# EAGLE board nrf5340_Ref_v21 (EAGLE 9.7.0)
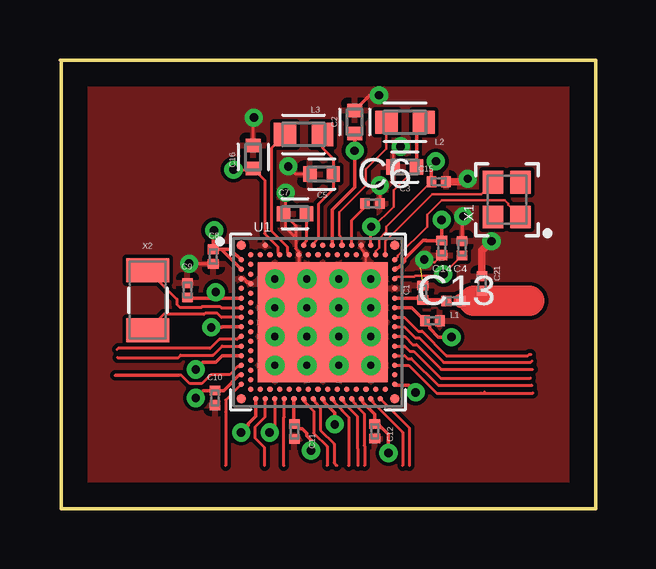
[diagram p0: board, top side]
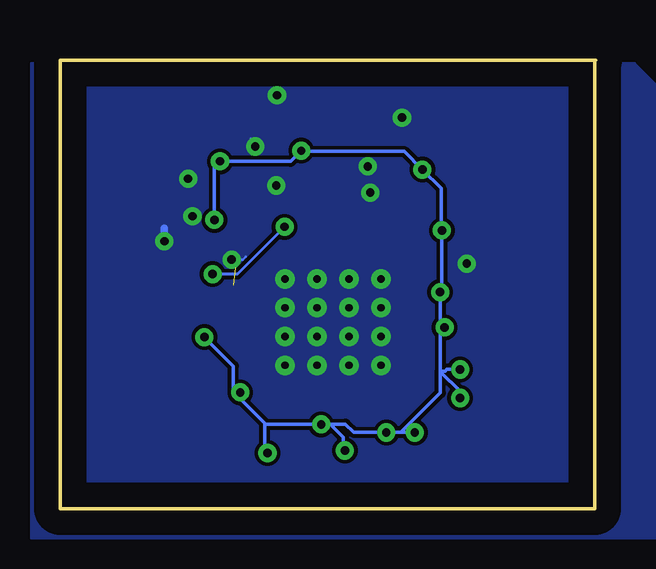
[diagram p1: board, bottom side, seen from below]

Size 22.33 x 18.7 mm. Coordinates in mm from the lower left corner, seen from the top.
Outline: 0,18.7 22.33,18.7 22.33,0 0.05,0 0.05,18.65 0,18.7
Copper layers (1+2*15+16): Top 0.035mm / dielectric 1.5mm / Route2 0.035mm / dielectric 0.15mm / Route15 0.035mm / dielectric 0.2mm / Bottom 0.035mm
Design rules "default *": minimum track width 0.005mm, minimum drill 0.35mm, track to track 6mil, track to pad 6mil, pad to pad 6mil, via to via 6mil, smd to smd 6mil, copper to edge 40mil, drill to drill 6mil, minimum pad ring 10mil, minimum via ring 8mil, stop-mask expansion 4mil, vias tented up to drill 0mil, thermal gap 10mil

## Footprints (pad centres in the part's own frame; a part is rotated, then mirrored left to right if it is on the bottom)
RESC0201_N = smd 0.4 x 0.45: 1 -0.305,0; 2 0.305,0
CAPC1005X60 = smd 0.56 x 0.629: 1 -0.485,0; 2 0.485,0
INDC1608X95N = smd 0.9 x 0.97: 1 -0.785,0 | smd 0.933 x 0.97: 2 0.769,0
XCVR_NRF5340-QKAA-R7 = drill 0.305 pad 0.61: 35 -1.8,-1.8; 36 -0.467,-1.8; 37 0.867,-1.8; 38 2.2,-1.8; 39 -1.8,-0.6; 40 -0.467,-0.6; 41 0.867,-0.6; 43 2.2,-0.6; 44 -1.8,0.6; 45 -0.467,0.6; 46 0.867,0.6; 47 2.2,0.6; 48 -1.8,1.8; 49 -0.467,1.8; 50 0.867,1.8; 51 2.2,1.8 | smd 5.4 x 5: 104 0.2,0 | smd 0.4 x 0.4: A1 -3.2,3.2; A31 3.2,3.2; AL1 -3.2,-3.2; AL31 3.2,-3.2 | smd 0.225 x 0.225: A5 -2.2,3.2; A13 -0.6,3.2; A15 -0.2,3.2; A17 0.2,3.2; A19 0.6,3.2; A21 1,3.2; A23 1.4,3.2; A25 1.8,3.2; A27 2.2,3.2; AA1 -3.2,-1; AA31 3.2,-1; AB2 -2.8,-1.2; AC1 -3.2,-1.4; AC31 3.2,-1.4; AD2 -2.8,-1.6; AE1 -3.2,-1.8; AE31 3.2,-1.8; AF2 -2.8,-2; AG1 -3.2,-2.2; AG31 3.2,-2.2; AH2 -2.8,-2.4; AJ1 -3.2,-2.6; AJ31 3.2,-2.6; AK2 -2.8,-2.8; AK4 -2.4,-2.8; AK6 -2,-2.8; AK8 -1.6,-2.8; AK10 -1.2,-2.8; AK12 -0.8,-2.8; AK14 -0.4,-2.8; AK16 0,-2.8; AK18 0.4,-2.8; AK20 0.8,-2.8; AK22 1.2,-2.8; AK24 1.6,-2.8; AK26 2,-2.8; AK28 2.4,-2.8; AK30 2.8,-2.8; AL3 -2.6,-3.2; AL5 -2.2,-3.2; AL7 -1.8,-3.2; AL9 -1.4,-3.2; AL11 -1,-3.2; AL13 -0.6,-3.2; AL15 -0.2,-3.2; AL17 0.2,-3.2; AL19 0.6,-3.2; AL21 1,-3.2; AL23 1.4,-3.2; AL25 1.8,-3.2; AL27 2.2,-3.2; AL29 2.6,-3.2; B2 -2.8,2.8; B4 -2.4,2.8; B6 -2,2.8; B8 -1.6,2.8; B10 -1.2,2.8; B12 -0.8,2.8; B14 -0.4,2.8; B16 0,2.8; B18 0.4,2.8; B20 0.8,2.8; B22 1.2,2.8; B24 1.6,2.8; B26 2,2.8; B28 2.4,2.8; B30 2.8,2.8; C1 -3.2,2.6; C31 3.2,2.6; D2 -2.8,2.4; E1 -3.2,2.2; E31 3.2,2.2; F2 -2.8,2; G1 -3.2,1.8; G31 3.2,1.8; H2 -2.8,1.6; J1 -3.2,1.4; J31 3.2,1.4; K2 -2.8,1.2; L1 -3.2,1; L31 3.2,1; M2 -2.8,0.8; N1 -3.2,0.6; N31 3.2,0.6; P2 -2.8,0.4; R1 -3.2,0.2; R31 3.2,0.2; T2 -2.8,0; U1 -3.2,-0.2; U31 3.2,-0.2; V2 -2.8,-0.4; W1 -3.2,-0.6; W31 3.2,-0.6; Y2 -2.8,-0.8
BT-XTAL_2016_N = smd 0.95 x 0.85: 1 -0.725,-0.575; 2 0.725,-0.575; 3 0.725,0.575; 4 -0.725,0.575
XTAL_3215_N = smd 1 x 1.8: 1 -1.25,0; 2 1.25,0

## Placement (x,y rotation side)
C1  0.7p  [RESC0201_N]  15.12,9 90 top
C2  1u  [CAPC1005X60]  12.28,16.12 90 top
C3  1u  [CAPC1005X60]  14.37,14.24 180 top
C4  2.2n  [RESC0201_N]  16.75,10.86 90 top
C5  1u  [CAPC1005X60]  10.9,13.95 180 top
C6  100n  [RESC0201_N]  13.02,12.72 0 top
C7  1u  [CAPC1005X60]  9.79,12.3 180 top
C8  100n  [RESC0201_N]  6.39,10.51 270 top
C9  100n  [RESC0201_N]  5.31,9.11 90 top
C10  100n  [RESC0201_N]  6.46,4.62 270 top
C11  100n  [RESC0201_N]  9.77,3.22 270 top
C12  100n  [RESC0201_N]  13.11,3.23 270 top
C13  100n  [RESC0201_N]  15.52,7.84 0 top
C14  100n  [RESC0201_N]  15.91,10.87 270 top
C15  100n  [RESC0201_N]  15.78,13.63 0 top
C16  1u  [CAPC1005X60]  8.05,14.66 90 top
C21  N.C.  [RESC0201_N]  17.58,9.39 90 top
L1  2.2n  [RESC0201_N]  16.4,8.66 180 top
L2  10u  [INDC1608X95N]  14.37,16.11 180 top
L3  10u  [INDC1608X95N]  10.15,15.6 180 top
U1  NRF5340-QKAA-R7  [XCVR_NRF5340-QKAA-R7]  10.75,7.78 0 top
X1  [BT-XTAL_2016_N]  18.62,12.88 90 top
X2  [XTAL_3215_N]  3.66,8.7 270 top

## Library data of the parts
C1 C4 C6 C8-C15 C21 L1 = ChronosV5 v10
C2 C3 C5 C7 C16 = ChronosV5 v10; CATEGORY: Capacitor
L2 L3 = Inductor; CATEGORY: Inductor; SUB-CATEGORY: Fixed
U1 = NRF5340-QKAA-R7; MANUFACTURER: Nordic Semiconductor; MAXIMUM_PACKAGE_HEIGHT: 0.85mm; PARTREV: 1.0; STANDARD: Manufacturer Recommendations
X1 X2 = Nordic_nRF

## Nets
DCCH: U1.J1
DECUSB: U1.B6
GND: C1.2 C2.2 C3.2 C4.2 C5.2 C6.2 C7.2 C8.2 C9.2 C10.2 C11.2 C12.2 C13.2 C14.2 C15.2 C16.2 C21.2 U1.35 U1.36 U1.37 U1.38 U1.39 U1.40 U1.41 U1.43 U1.44 U1.45 U1.46 U1.47 U1.48 U1.49 U1.50 U1.51 U1.104 U1.A5 U1.A25 U1.B12 U1.B26 U1.G1 U1.H2 U1.J31
N$1: C1.1 L1.2 U1.L31
N$2: U1.C31 X1.1
N$3: U1.B30 X1.3
N$4: C6.1 U1.A23
N$5: L2.2 U1.A21
N$6: L3.2 U1.B10
N$7: C5.1 L3.1 U1.A15
N$8: C3.1 C4.1 L2.1 U1.A27 U1.G31
N$9: C7.1 U1.A13
P0.00: U1.N1 X2.1
P0.01: U1.R1 X2.2
P0.02: U1.W1
P0.03: U1.AA1
P0.04: U1.V2
P0.05: U1.Y2
P0.06: U1.AB2
P0.07: U1.AD2
P0.08: U1.AH2
P0.09: U1.AJ1
P0.10: U1.AK2
P0.11: U1.AK4
P0.12: U1.AK6
P0.13: U1.AL5
P0.14: U1.AK8
P0.15: U1.AK10
P0.16: U1.AL9
P0.17: U1.AK12
P0.18: U1.AK14
P0.19: U1.AL13
P0.20: U1.AK16
P0.21: U1.AL15
P0.22: U1.AK18
P0.23: U1.AK20
P0.24: U1.AL27
P0.25: U1.AK28
P0.26: U1.AL29
P0.27: U1.AK30
P0.28: U1.AE31
P0.29: U1.U31
P0.30: U1.B24
P0.31: U1.B22
P1.00: U1.M2
P1.01: U1.P2
P1.02: U1.AE1
P1.03: U1.AF2
P1.04: U1.AL19
P1.05: U1.AK22
P1.06: U1.AL21
P1.07: U1.AK24
P1.08: U1.AL23
P1.09: U1.AK26
P1.10: U1.R31
P1.11: U1.B20
P1.12: U1.B18
P1.13: U1.A17
P1.14: U1.B16
P1.15: U1.B14
RESET: U1.AC31
RF: C21.1 L1.1
SWDCLK: U1.W31
SWDIO: U1.AA31
VDD: C2.1 C8.1 C9.1 C10.1 C11.1 C12.1 C13.1 C14.1 C15.1 C16.1 U1.A19 U1.AC1 U1.AG1 U1.AJ31 U1.AL3 U1.AL7 U1.AL11 U1.AL17 U1.AL25 U1.B8 U1.B28 U1.C1 U1.E1 U1.E31 U1.L1 U1.N31 U1.U1

## Tracks (layer width: path | path; a pad name or v marks a point on that pad's centre or on a via)
GND  (via drill 0.35, 0.35 pad 0.5)  (1 unrouted)
  Top 0.102: C14.2 15.61,10.27 15.12,10.27 15.12,10.26 | 15.12,10.26 15.02,10.16 15.02,10.05 | U1.A25 12.55,10.83 12.67,10.71 12.67,10.66 U1.B26 12.75,9.99 | U1.B12 9.95,10.35 9.95,9.91 U1.49 | v14.19,15.09 13.9,14.8 13.9,14.25 C3.2 | 12.75,9.99 12.75,9.78 U1.51 | U1.104 10.95,8.19 12.75,9.99 | 15.12,10.26 15.12,10.33 v15.18,10.38
  Top 0.127: C6.2 v13.33,13.46 v13.32,13.47 | 9.95,10.35 9.95,10.72 9.82,10.84 9.82,11.3 | C7.2 9.82,11.78 9.82,11.3 | C5.2 9.83,13.95 v9.51,14.27 | 9.82,11.3 9.4,11.72 v9.4,13.18 | C16.2 8.05,16.27 v8.08,16.3
  Top 0.15: C4.2 16.75,12.13 v16.81,12.19
  Top 0.152: U1.G1 7.67,9.58 7.81,9.44 7.89,9.44 U1.H2 | C8.2 5.4,10.2 v5.38,10.22 | C2.2 12.9,17.23 v13.29,17.23
  Top 0.305: C21.2 17.58,10.75 v17.98,11.15 | C15.2 16.87,13.63 v16.99,13.75
  Bottom 0.102: v14.19,15.09 14.19,15.22 14.39,15.42 | v15.18,10.38 14.71,10.38 14.59,10.5
  Bottom 0.305: 17.98,11.68 v17.98,11.15
  pour Bottom (no thermals): -21.41,-1.23 23.52,-1.23 23.52,18.57 -1.61,18.57
  pour Top: 21.48,19.28 -1,19.28 -1,-0.71 22.65,-0.71 23.24,-0.12 23.24,17.52
N$1
  Top 0.15: U1.L31 15.03,8.78 C1.1
  Top 0.203: C1.1 16.06,8.7 L1.2
N$2
  Top 0.102: U1.C31 14.08,10.51 14.08,10.54 15.3,11.76 15.3,12.26 15.9,12.86 18.53,12.86 18.67,12.71 18.67,12.68 X1.1
N$3
  Top 0.102: U1.B30 13.55,10.81 13.55,11.15 15.51,13.11 17.55,13.11 X1.3
N$4
  Top 0.127: C6.1 12.71,12.59 12.15,12.02 U1.A23
N$5
  Top 0.102: L2.2 13.6,15.01 12.74,14.14 12.74,13.46 11.63,12.35 11.63,11.4 11.75,11.28 U1.A21
N$6
  Top 0.127: U1.B10 9.48,10.65 9.48,10.91 8.81,11.58 8.81,15.03 L3.2
N$7
  Top 0.127: U1.A15 10.55,11.05 10.77,11.27 10.77,12.69 11.38,13.3 C5.1 11.38,14.59 10.94,15.05 L3.1
N$8  (via drill 0.35 pad 0.5)
  Top 0.102: U1.G31 14.03,9.66 14.77,9.66 14.81,9.71 15.9,9.71 v15.97,9.78 C4.1 | 14.87,14.23 13.9,13.27 13.9,12.58 13.02,11.7
  Top 0.127: U1.A27 12.95,11.63 13.02,11.7 v12.97,11.75
  Top 0.152: L2.1 14.87,15.82 14.87,14.23 C3.1
  Bottom 0.127: v12.97,11.75 14.94,9.78 v15.97,9.78
N$9
  Top 0.127: C7.1 10.28,11.7 10.28,11.18 10.15,11.05 U1.A13
P0.00
  Top 0.127: U1.N1 6.72,8.38 6.66,8.44 5.94,8.44 5.89,8.39 5,8.39 4.87,8.52 4.87,8.74 X2.1
P0.01
  Top 0.127: X2.2 4.32,8.11 6.01,8.11 6.06,8.16 6.55,8.16 6.72,7.98 U1.R1
P0.02
  Top 0.127: U1.W1 7.48,7.11 7.41,7.11 7.37,7.06 6.64,7.06 6.26,6.68 2.42,6.68 2.38,6.64
P0.03
  Top 0.127: 2.4,6.3 4.93,6.3 5.03,6.4 6.38,6.4 6.76,6.78 U1.AA1
P0.09
  Top 0.127: U1.AJ1 6.9,4.53 6.9,4.03 6.9,4.02 6.9,1.8
P0.13
  Top 0.127: U1.AL5 8.55,3.83 8.14,3.43 8.14,2.93 8.53,2.54 8.53,1.8
P0.16
  Top 0.127: U1.AL9 9.35,3.83 9.33,3.81 9.33,1.81 9.32,1.8
P0.19
  Top 0.127: 10.41,4.25 10.22,4.44 10.22,4.51 U1.AL13 10.15,4.49 10.57,4.07 10.57,3.16 11.13,2.6 11.13,1.8
P0.21
  Top 0.127: U1.AL15 10.62,4.51 10.62,4.44 10.72,4.35 10.72,4.32 10.85,4.18 10.85,3.27 11.42,2.71 11.42,1.92 11.54,1.8
P0.24
  Top 0.127: U1.AL27 13.02,4.51 13.02,4.44 14.28,3.18 14.28,1.8
P0.26
  Top 0.127: U1.AL29 14.56,3.37 14.56,1.8
P0.28
  Top 0.127: U1.AE31 14.53,5.98 15.69,4.82 17.55,4.82 17.65,4.82 | 17.65,4.82 17.69,4.86 17.69,4.87 | 17.65,4.82 19.69,4.82 19.7,4.83
P0.29
  Top 0.127: U1.U31 14.35,7.58 14.81,7.12 14.97,7.12 15.99,6.1 19.61,6.1 19.66,6.15
P1.02
  Top 0.127: 4.96,5.56 2.3,5.56 5.06,5.56 5.41,5.21 5.9,5.21 6.28,5.59 7.07,5.59 7.38,5.91 7.48,5.91 U1.AE1
P1.04
  Top 0.127: U1.AL19 11.42,4.51 11.42,4.44 11.76,4.11 11.76,4.09 12.04,3.8 12.04,1.81 12.03,1.8
P1.06
  Top 0.127: U1.AL21 11.82,4.51 11.82,4.44 12.04,4.23 12.04,4.2 12.39,3.85 12.39,2.52 12.41,2.5 12.41,1.8
P1.08
  Top 0.127: U1.AL23 12.22,4.51 12.22,4.44 12.32,4.35 12.32,4.32 12.67,3.96 12.67,2.64 12.69,2.61 12.69,1.8
P1.10
  Top 0.127: U1.R31 14.35,7.98 14.93,7.4 15.09,7.4 16.1,6.38 19.5,6.38 19.54,6.43 19.62,6.43
RESET
  Top 0.127: U1.AC31 14.36,6.38 14.49,6.26 14.65,6.26 15.76,5.15 19.64,5.15 19.66,5.13
RF
  Top 0.305: L1.1 17.16,8.66 C21.1
  Top 0.61: L1.1 17.24,8.66
  Top 1.27: 17.24,8.66 19.56,8.66
SWDCLK
  Top 0.127: U1.W31 14.35,7.18 14.69,6.84 14.85,6.84 15.88,5.81 19.69,5.81
SWDIO
  Top 0.127: U1.AA31 14.36,6.78 14.58,6.56 14.74,6.56 15.87,5.43 19.58,5.43 19.61,5.46
VDD  (via drill 0.35 pad 0.5)
  Top 0.102: U1.B28 13.15,10.73 13.29,10.88 13.29,11.25 13.6,11.56 13.6,11.75 C15.1
  Top 0.127: U1.B8 9.08,10.65 9.08,10.92 8.53,11.46 8.53,13.7 C16.1 7.99,14.11 7.23,14.11 v7.23,14.13 | U1.AL7 8.95,3.39 v8.74,3.18
  Top 0.15: C14.1 15.27,11.17 15.25,11.2
  Top 0.152: U1.E31 14.01,10.04 14.09,10.04 14.36,10.31 14.36,10.42 15.13,11.2 15.25,11.2 | U1.A19 11.35,12.46 12.28,13.39 v12.28,14.92 C2.1 | v15.66,14.48 15.47,14.29 C15.1 | v15.9,12.04 v15.91,12.03 C14.1 | 6.3,10.81 C8.1 | 6.49,8.78 U1.L1 | 6.49,8.78 5.33,8.78 C9.1 | U1.C1 7.38,10.55 7.37,10.55 7.11,10.81 C8.1 | U1.E1 6.71,10.81 C8.1 | v6.42,11.6 6.39,11.57 C8.1 | U1.U1 6.76,7.58 6.74,7.56 v6.3,7.56 | 8.97,4.56 U1.AL7 | U1.AL11 9.75,3.54 C11.1 9.95,3.34 10.09,3.34 10.28,3.15 10.28,3.04 10.46,2.86 v10.46,2.43 | U1.AL17 11.01,4.52 11.01,4.44 11.45,4 v11.45,3.52 | U1.AL25 12.61,4.52 12.61,4.44 13.11,3.94 C12.1 13.25,3.54 13.69,3.1 v13.69,2.33 | U1.AJ31 13.99,5.14 14.53,5.14 v14.82,4.85 | U1.N31 14.66,8.38 15.2,7.84 | 15.2,7.84 C13.1 | U1.AL3 8.15,3.85 7.85,3.55 7.85,3.48 v7.55,3.18 | U1.AG1 7.47,5.58 6.81,4.92 C10.1 6.03,4.92 6.02,4.92 5.96,4.92 v5.66,4.62 | 6.49,8.78 v6.49,9.03 | U1.AC1 6.77,6.38 6.5,6.11 5.96,6.11 v5.66,5.81 | 15.2,7.84 15.4,7.64 15.4,7.52 15.76,7.16 v16.31,7.16
  Bottom 0.127: 12.27,14.89 12.28,14.9 v12.28,14.92
  Bottom 0.152: v15.9,12.04 15.9,14.24 v15.66,14.48 12.72,14.48 v12.28,14.92 12.25,14.89 7.99,14.89 v7.23,14.13 6.45,13.35 6.45,11.63 v6.42,11.6 6.42,8.85 6.49,8.78 | 6.49,8.78 6.49,7.37 | 6.49,7.37 6.49,5.73 | 6.49,5.73 6.48,5.72 | 8.13,3.18 6.48,4.83 6.48,5.72 | 8.13,3.18 v8.74,3.18 10.09,3.18 10.44,3.53 11.07,3.53 | 11.62,3.52 11.61,3.53 11.07,3.53 | 13.8,3.56 13.76,3.52 11.62,3.52 | 13.8,3.56 15.11,4.87 15.11,5.14 | 8.13,3.18 v7.55,3.18 | 11.07,3.53 10.53,2.99 10.53,2.49 v10.46,2.43 | 11.62,3.52 v11.45,3.52 | 13.8,3.56 13.8,2.44 v13.69,2.33 | 6.49,5.73 6.28,5.73 6.21,5.81 v5.66,5.81 | 6.49,7.37 v6.3,7.56 | 6.49,8.78 v6.49,9.03 | v5.66,4.62 5.66,4.9 6.48,5.72 | 15.11,5.14 15.11,5.95 v16.31,7.16 | 15.11,5.14 v14.82,4.85